# Altium PCB test22.PcbDoc
Units mm, origin at the board's own origin, x right, y up, seen from the top; angles counter-clockwise.
Board outline 152.4 x 101.6 mm, 2 copper layers (Top Layer, Bottom Layer); 2 components, 0 nets, 9 pads, 0 vias.
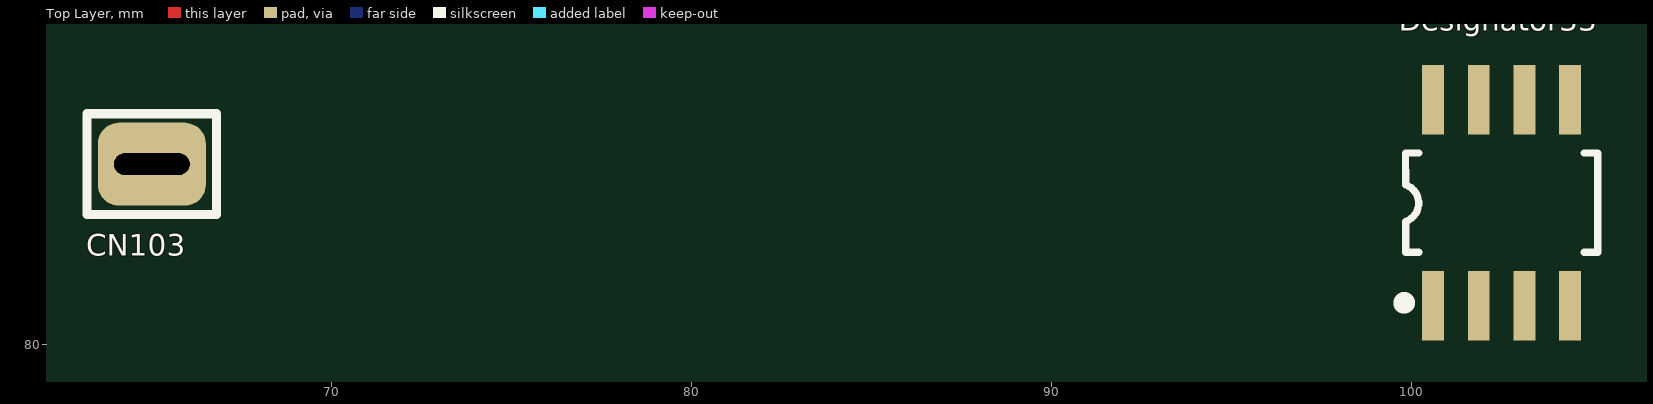
[diagram p0: Top Layer view]
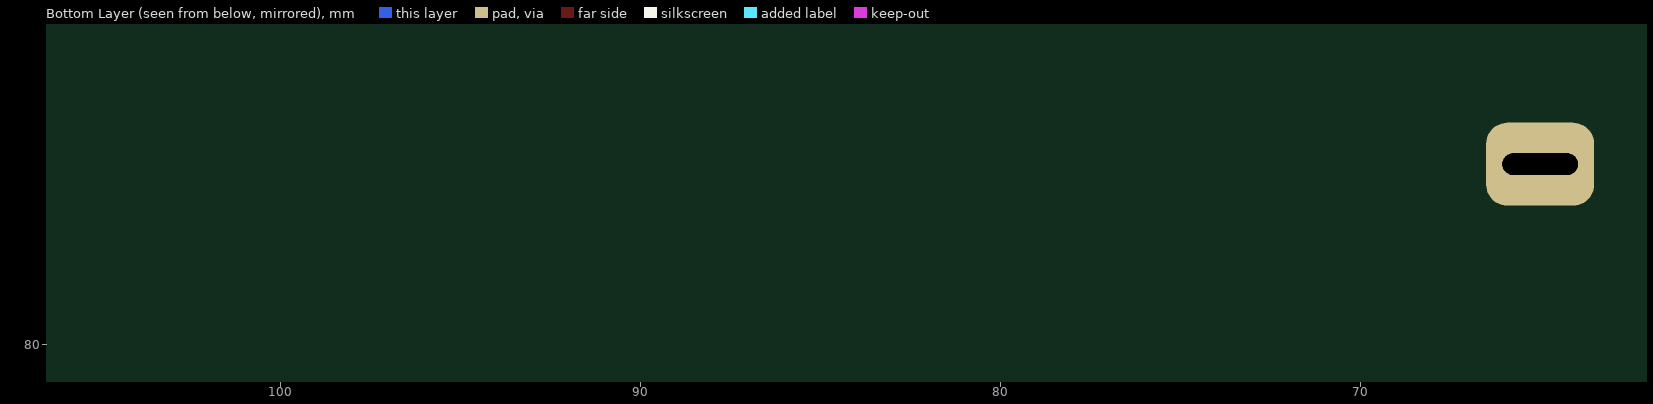
[diagram p1: Bottom Layer view, seen from below]

## Layer stack, top to bottom
Top Solder: solder mask 0.0102, Solder Resist, Dk 3.5
Top Layer: signal copper 0.0356
Dielectric 1: dielectric 0.32, FR-4, Dk 4.8
Bottom Layer: signal copper 0.0356
Bottom Solder: solder mask 0.0102, Solder Resist, Dk 3.5

## Board outline
25.4,25.4 177.8,25.4 177.8,127 25.4,127

## Design rules (kind name [scope] priority, off if disabled: settings)
Clearance [All] p1: gap=0.254 ignorepadtopadclearanceinfootprint=FALSE except(0: Arc-Hole Track-Hole SMDPad-Hole THPad-Hole Via-Hole Fill-Hole Poly-Hole Region-Hole Text-Hole)
PolygonConnect [All] p1: connectstyle=Relief reliefconductorwidth=0.254 reliefentries=4 polygonreliefangle="90 Angle" airgapwidth=0.254
RoutingVias [All] p1: holewidth=0.711 width=1.27 viastyle="Through Hole" minholewidth=0.711 minwidth=1.27 maxholewidth=0.711 maxwidth=1.27
SolderMaskExpansion [All] p1: expansion=0.102 istentingtop=FALSE
Width [All] p1: maxlimit=0.254 minlimit=0.254 preferedwidth=0.254
30 further rules are at their usual default settings.

## Components (designator, comment, footprint, x,y, rotation, side; value= is the part's Value field where it differs from the comment)
CN103 "Faston 4.8mm" CON-RAST2.5-FORK 65,85 r180 top locked
Designator33 "Comment" ANS_SO-8_R_V3_3D 102.489,83.947 r0 top

## Footprints (in the part's own frame and the unit in brackets; to place one, negate y for a bottom-side part, rotate by r counter-clockwise, add the part's x,y. Pads: shape width x height; smd on the part's side, far side on the other; paste and mask are expansions set on the pad)
ANS_SO-8_R_V3_3D [mil] "removed center pad"
  rect 24x76 smd: 1(-74.8,-113.19) 2(-24.8,-113.19) 3(25.2,-113.19) 4(75.2,-113.19) 5(75.2,111.81) 6(25.2,111.81) 7(-24.8,111.81) 8(-74.8,111.81)
  silkscreen extent -108,-112 105,54, body extent -96,-118 96,118, height 67
CON-RAST2.5-FORK [mm]
  rrect50% 3x2.3 hole 0.6 slot 2.1 at 0 deg: 1(0,0)
  silkscreen extent -1.8,-1.4 1.8,1.4, body extent -1.72,-0.25 1.72,0.25, height 1.7

## Part data
CN103: library part P_P193518044, "P_P193518044", ELECTRICAL RATINGS="TAB FASTON 187 SERIES", COMPONENT="Faston Terminal 4.8mm", EECON CODE=193518001, MOUNT=PTH, SUPPLIER=TYCO, SUPPLIER PN=1217756-1

## Nets (pads, with @x,y where several pads share a name; then routed paths per layer and width w, separated by ;. In a path a pad name is that pad's centre, name@x,y a point inside that pad or via, vN(x,y) a via of type N, cw(c..) or ccw(c..) an arc to the next point about the centre after c; other vN are vias at no path point)
pads on no net: CN103.1 Designator33.1 Designator33.2 Designator33.3 Designator33.4 Designator33.5 Designator33.6 Designator33.7 Designator33.8

## Silkscreen, mask and mechanical layers (free items; w line width, h text height)
Mechanical 2:
  lines w0.2: 140,76 111,76 111,92 140,92 140,65 120,65 120,80 140,80
Mechanical 13:
  lines w0.2: 62.978,82.838 62.978,86.018